# EAGLE board MainBoard (EAGLE 6.3)
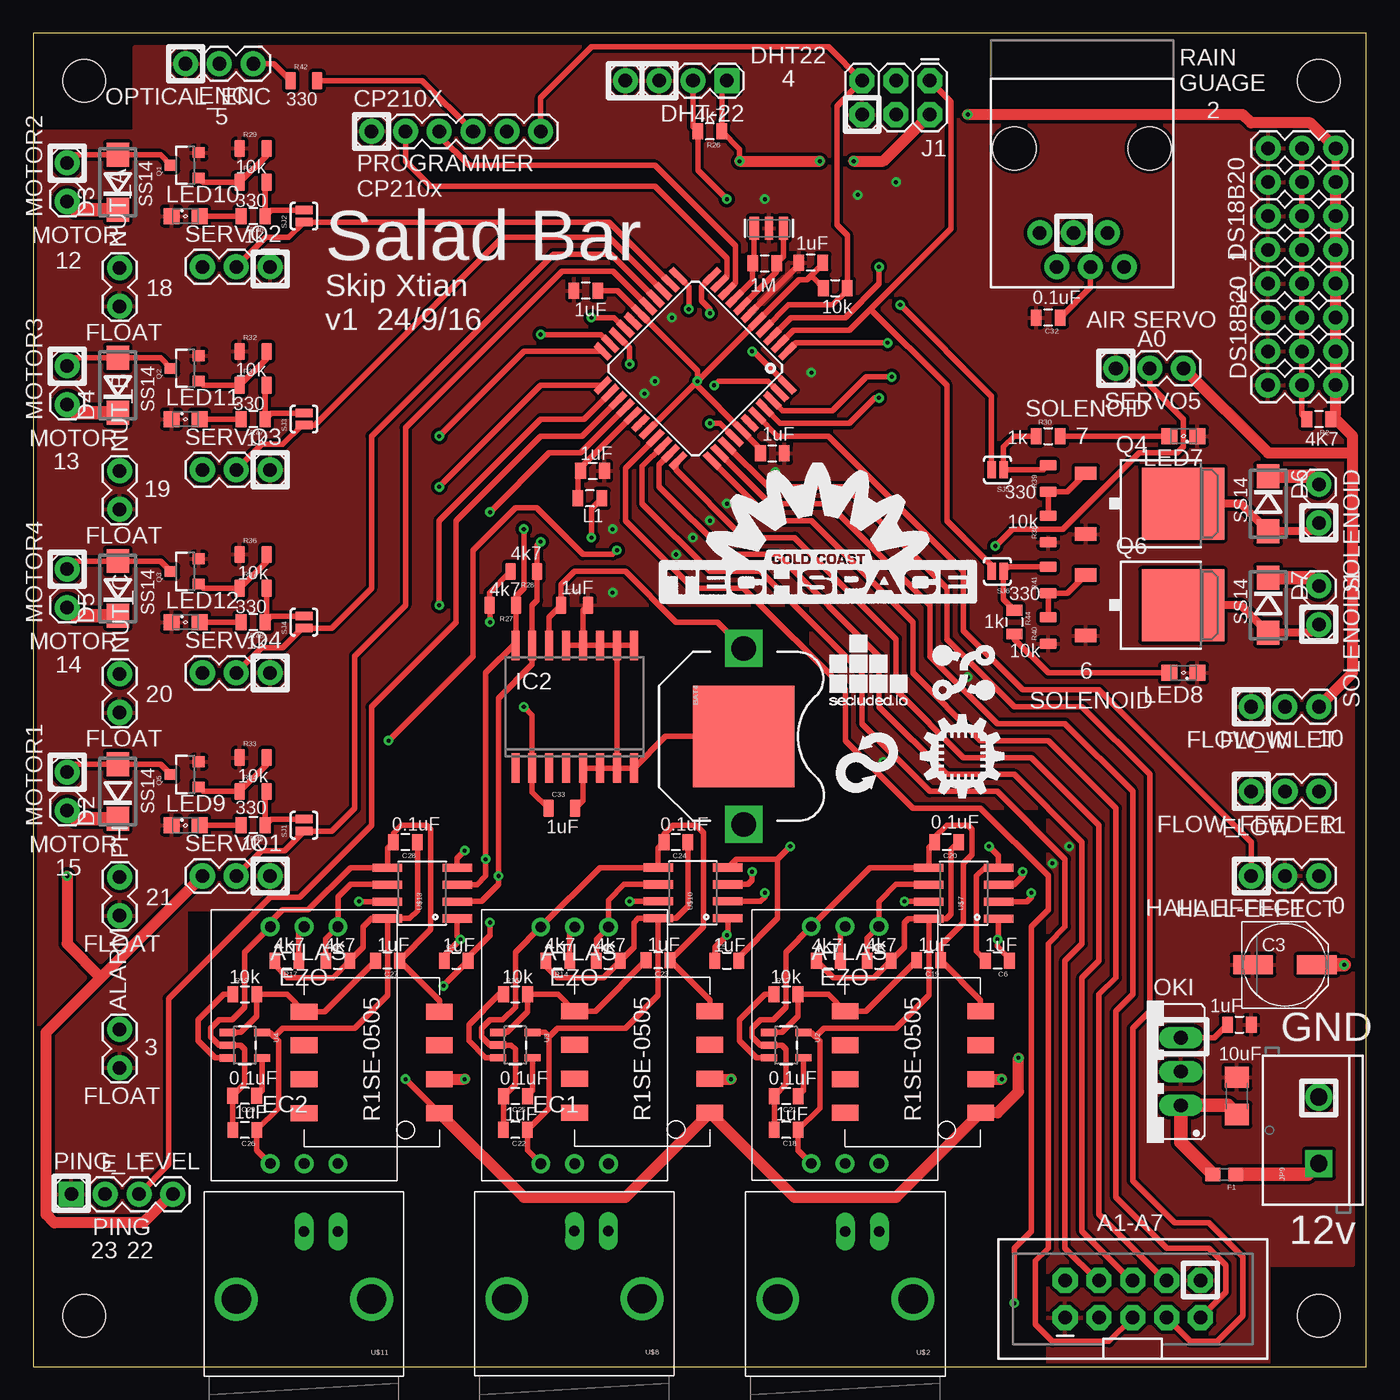
[diagram p0: board, top side]
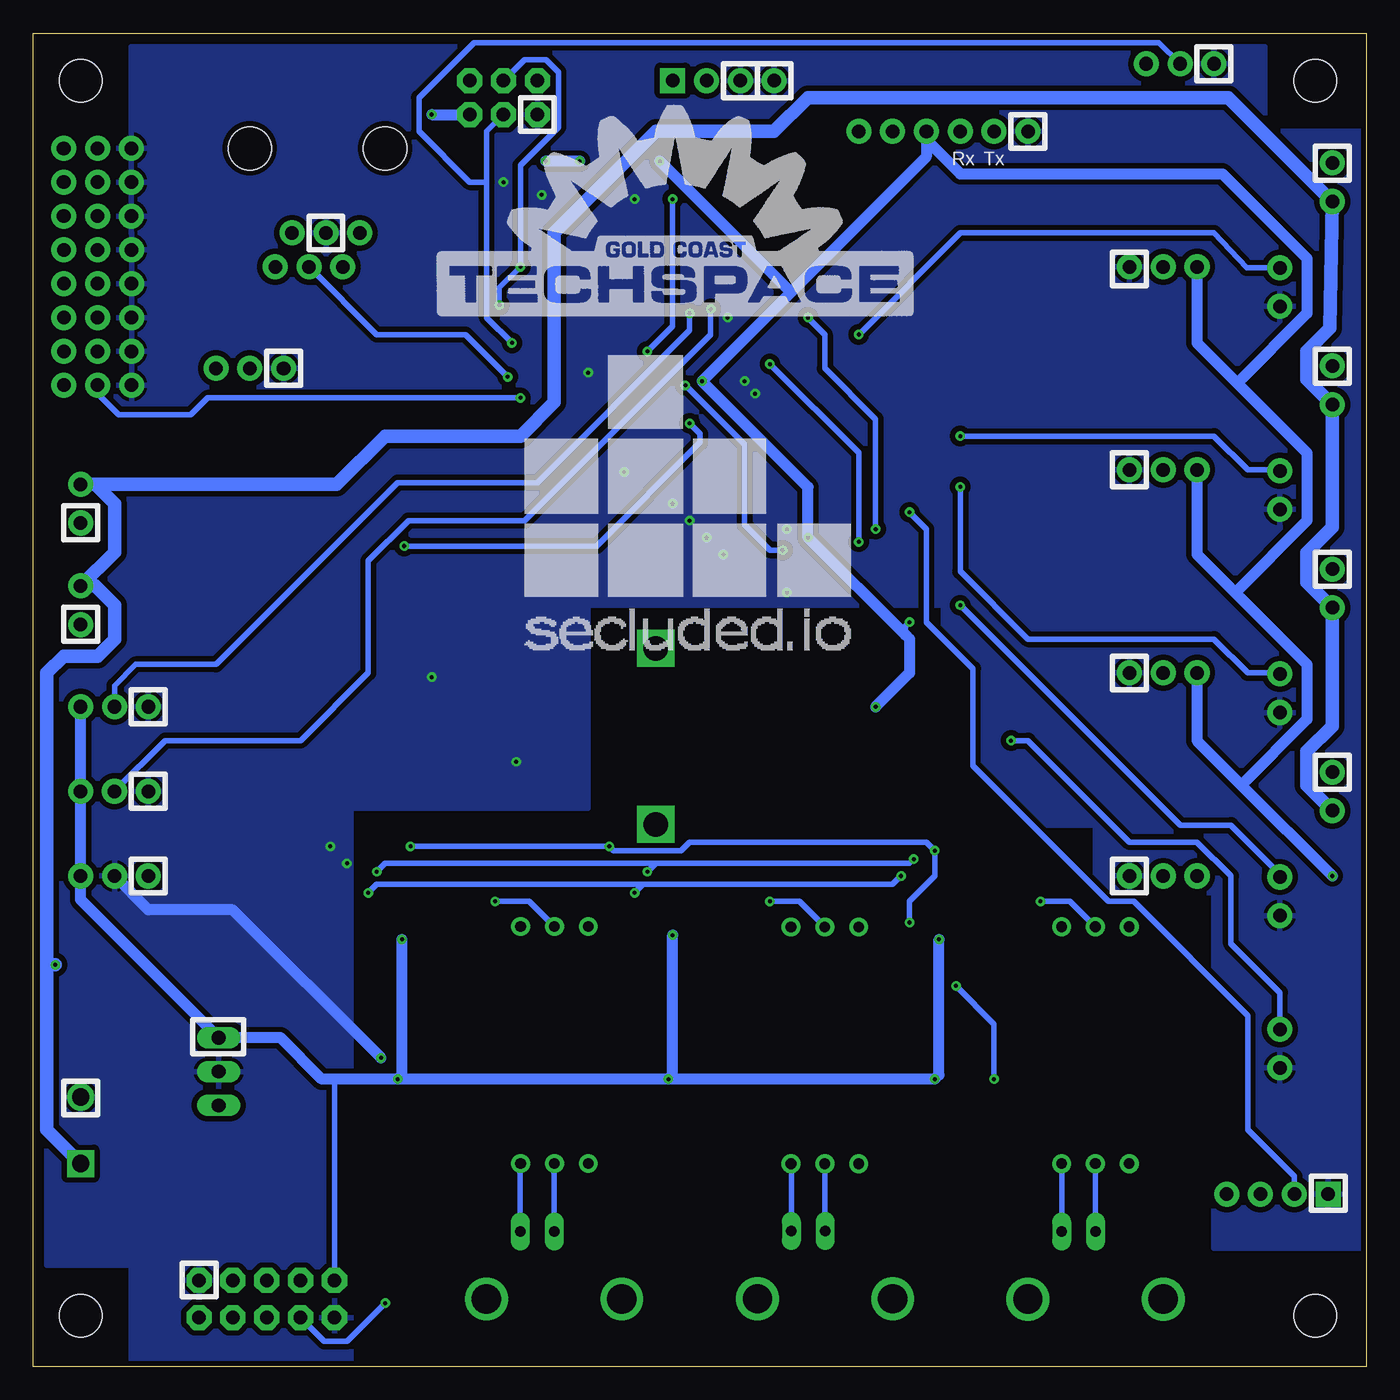
[diagram p1: board, bottom side, seen from below]

Size 100.08 x 100.08 mm. Coordinates in mm from the lower left corner, seen from the top.
Outline: 0,0 100.08,0 100.08,100.08 0,100.08 0,0
Copper layers (1*16): Top 0.035mm / dielectric 1.5mm / Bottom 0.035mm
Design rules "DFRobot_Eagle_Rule_v0.4": minimum track width 6mil, minimum drill 12mil, track to track 6mil, track to pad 6mil, pad to pad 6mil, via to via 6mil, smd to smd 0mil, copper to edge 10mil, drill to drill 10mil, minimum pad ring 12mil, minimum via ring 8mil, stop-mask expansion 2mil, vias tented up to drill 25mil, thermal gap 10mil
Holes 3.2 mm at 3.81,3.81 96.52,3.81 96.52,96.52 3.81,96.52

## Footprints (pad centres in the part's own frame; a part is rotated, then mirrored left to right if it is on the bottom)
1X02_LOCK = drill 1.016 pad 1.88: 1 -0.178,0; 2 2.718,0
BATTCON_12MM_PTH = smd 7.62 x 7.62: GND 0,0 | drill 1.854 square: VCC@1 -6.604,0; VCC@2 6.604,0
1206 = smd 1.6 x 1.8: 1 -1.4,0; 2 1.4,0
PANASONIC_D = smd 3 x 1.4: + 2.4,0; - -2.4,0
0805 = smd 0.8 x 1.2: 1 -0.9,0; 2 0.9,0
0805' = smd 0.8 x 1.3: 1 -1,0; 2 1,0
1X06 = drill 1.016 pad 1.88: 1 0,0; 2 2.54,0; 3 5.08,0; 4 7.62,0; 5 10.16,0; 6 12.7,0
DO214BA = smd 1.8 x 1.7: A 2.05,0; C -2.05,0
1X04 = drill 1.016 pad 1.88 square: 1 0,0 | drill 1.016 pad 1.88: 2 2.54,0; 3 5.08,0; 4 7.62,0
1X03 = drill 1.016 pad 1.88: 1 0,0; 2 2.54,0; 3 5.08,0
ATLAS-EZO = drill 0.8: GND -2.54,8.89; PRA 2.54,-8.89; PRB 0,-8.89; RX 2.54,8.89; TX 0,8.89; VCC -2.54,-8.89
0603 = smd 1.1 x 1: 1 -0.85,0; 2 0.85,0
TQFP44 = smd 1.5 x 0.5: 1 -5.8,4; 2 -5.8,3.2; 3 -5.8,2.4; 4 -5.8,1.6; 5 -5.8,0.8; 6 -5.8,0; 7 -5.8,-0.8; 8 -5.8,-1.6; 9 -5.8,-2.4; 10 -5.8,-3.2; 11 -5.8,-4; 23 5.8,-4; 24 5.8,-3.2; 25 5.8,-2.4; 26 5.8,-1.6; 27 5.8,-0.8; 28 5.8,0; 29 5.8,0.8; 30 5.8,1.6; 31 5.8,2.4; 32 5.8,3.2; 33 5.8,4 | smd 0.5 x 1.5: 12 -4,-5.8; 13 -3.2,-5.8; 14 -2.4,-5.8; 15 -1.6,-5.8; 16 -0.8,-5.8; 17 0,-5.8; 18 0.8,-5.8; 19 1.6,-5.8; 20 2.4,-5.8; 21 3.2,-5.8; 22 4,-5.8; 34 4,5.8; 35 3.2,5.8; 36 2.4,5.8; 37 1.6,5.8; 38 0.8,5.8; 39 0,5.8; 40 -0.8,5.8; 41 -1.6,5.8; 42 -2.4,5.8; 43 -3.2,5.8; 44 -4,5.8
SO16W = smd 0.6 x 2.2: 1 -4.445,-4.6; 2 -3.175,-4.6; 3 -1.905,-4.6; 4 -0.635,-4.6; 5 0.635,-4.6; 6 1.905,-4.6; 7 3.175,-4.6; 8 4.445,-4.6; 9 4.445,4.6; 10 3.175,4.6; 11 1.905,4.6; 12 0.635,4.6; 13 -0.635,4.6; 14 -1.905,4.6; 15 -3.175,4.6; 16 -4.445,4.6
2X3 = drill 1.016 pad 1.88 octagon: 1 0,0; 2 0,2.54; 3 2.54,0; 4 2.54,2.54; 5 5.08,0; 6 5.08,2.54
SCREWTERMINAL-5MM-2 = drill 1.3 pad 2.032 square: 1 0,0 | drill 1.3 pad 2.032: 2 5,0
SML0805 = smd 1.2 x 1.2: A 1.05,0; C -1.05,0
78XXS = drill 1.016 long: GND 0,-2.54; IN -2.54,-2.54; OUT 2.54,-2.54
SOT23-3 = smd 0.8 x 0.9: 1 -0.95,-1; 2 0.95,-1; 3 0,1.1
DPACK = smd 1 x 1.6: 1 -2.28,-4.8; 3 2.28,-4.8 | smd 5.4 x 6.2: 2 0,2.5
RJ11-6 = drill 1.016 pad 1.88: 1 1.905,8.89; 2 3.175,6.35; 3 4.445,8.89; 4 5.715,6.35; 5 6.985,8.89; 6 8.255,6.35 | hole 3.251: 0,0; 10.16,0
SJ_2S-NO = smd 0.635 x 1.27: 1 -0.45,0; 2 0.45,0
2X5-SHROUDED_LOCK = drill 1.016 pad 1.88 octagon: 1 -1.397,5.08; 2 1.397,5.08; 3 -1.397,2.54; 4 1.397,2.54; 5 -1.397,0; 6 1.397,0; 7 -1.397,-2.54; 8 1.397,-2.54; 9 -1.397,-5.08; 10 1.397,-5.08
SOT23-5 = smd 0.55 x 1.2: 1 -0.95,-1.3; 2 0,-1.3; 3 0.95,-1.3; 4 0.95,1.3; 5 -0.95,1.3
BNC = drill 2.2: 3 -5.08,5.08; 4 5.08,5.08 | drill 0.8 long: GND -2.54,0; S 0,0
R1SE-0505 = smd 1.2 x 2: GND -3.81,-5.08; ISO_GND 3.81,-5.08; ISO_VCC 3.81,5.08; P$1 1.27,-5.08; P$5 1.27,5.08; P$7 -1.27,5.08; P$8 -3.81,5.08; VCC -1.27,-5.08
SO08 = smd 0.61 x 2.21: 1 -1.905,-2.616; 2 -0.635,-2.616; 3 0.635,-2.616; 4 1.905,-2.616; 5 1.905,2.616; 6 0.635,2.616; 7 -0.635,2.616; 8 -1.905,2.616
FREQCTRL_RESONATOR-SMD = smd 0.7 x 1.7: 1 -1.1,0; 3 1.1,0 | smd 0.6 x 1.7: 2 0,0

## Placement (x,y rotation side)
ALARM  [1X02_LOCK]  6.48,25.15 270 top
BAT4  [BATTCON_12MM_PTH]  53.34,47.31 270 top
C1  10uF  [1206]  90.37,20.32 90 top
C3  [PANASONIC_D]  93.98,30.16 0 top
C4  1uF  [0805]  31.75,30.48 0 top
C5  1uF  [0805]  52.07,30.48 0 top
C6  1uF  [0805]  72.39,30.48 180 top
C7  1uF  [0805]  58.37,82.87 180 top
C10  1uF  [0805]  41.99,67.23 0 top
C12  1uF  [0805]  90.55,25.68 0 top
C13  1uF  [0805]  41.49,80.77 180 top
C14  1uF  [0805]  55.49,68.55 0 top
C18  1uF  [0805]  56.53,17.78 180 top
C19  1uF  [0805]  67.23,30.49 180 top
C20  0.1uF  [0805]  68.56,39.37 180 top
C21  0.1uF  [0805]  56.54,20.32 180 top
C22  1uF  [0805]  36.19,17.77 180 top
C23  1uF  [0805]  46.91,30.49 180 top
C24  0.1uF  [0805]  48.25,39.37 180 top
C25  0.1uF  [0805]  36.2,20.31 180 top
C26  1uF  [0805]  15.88,17.77 180 top
C27  1uF  [0805]  26.6,30.48 180 top
C28  0.1uF  [0805]  27.94,39.37 180 top
C29  0.1uF  [0805]  15.87,20.32 180 top
C32  0.1uF  [0805]  76.2,78.74 180 top
C33  1uF  [0805']  39.69,41.91 0 top
C34  1uF  [0805']  40.64,57.15 0 top
CP210X  [1X06]  25.4,92.71 0 top
D2  SS14  [DO214BA]  6.35,43.18 90 top
D3  SS14  [DO214BA]  6.35,88.9 90 top
D4  SS14  [DO214BA]  6.35,73.66 90 top
D5  SS14  [DO214BA]  6.35,58.42 90 top
D6  SS14  [DO214BA]  92.71,64.77 270 top
D7  SS14  [DO214BA]  92.71,57.15 270 top
DHT-22  [1X04]  52.07,96.52 180 top
DS18B20_1  [1X03]  97.78,73.66 180 top
DS18B20_2  [1X03]  97.78,76.2 180 top
DS18B20_3  [1X03]  97.78,78.74 180 top
DS18B20_4  [1X03]  97.78,81.28 180 top
DS18B20_5  [1X03]  97.78,83.82 180 top
DS18B20_6  [1X03]  97.79,86.36 180 top
DS18B20_7  [1X03]  97.79,88.9 180 top
DS18B20_8  [1X03]  97.79,91.44 180 top
EC  ATLAS-EZO  [ATLAS-EZO]  60.95,24.14 0 top
EC1  ATLAS-EZO  [ATLAS-EZO]  40.64,24.12 0 top
EC2  [ATLAS-EZO]  20.33,24.13 0 top
F1  PTC0603  [0603]  89.41,14.43 180 top
FLOW_FEEDER  [1X03]  96.52,43.18 180 top
FLOW_INLET  [1X03]  96.52,49.53 180 top
HALL-EFFECT  [1X03]  96.52,36.83 180 top
IC1  ATMEGA644A  [TQFP44]  49.69,74.93 225 top
IC2  DS3231/SO  [SO16W]  40.64,49.53 0 top
J1  AVR_SPI_PRG_6PTH  [2X3]  67.31,96.52 180 top
JP9  [SCREWTERMINAL-5MM-2]  96.52,15.24 90 top
L1  [0805]  41.78,65.17 180 top
LED7  [SML0805]  86.36,69.85 180 top
LED8  [SML0805]  86.36,52.07 180 top
LED9  [SML0805]  11.43,40.64 0 top
LED10  [SML0805]  11.43,86.36 0 top
LED11  [SML0805]  11.43,71.12 0 top
LED12  [SML0805]  11.43,55.88 0 top
MOTOR1  [1X02_LOCK]  2.54,41.91 90 top
MOTOR2  [1X02_LOCK]  2.54,87.63 90 top
MOTOR3  [1X02_LOCK]  2.54,72.39 90 top
MOTOR4  [1X02_LOCK]  2.54,57.15 90 top
NUT_A  [1X02_LOCK]  6.48,82.3 270 top
NUT_B  [1X02_LOCK]  6.48,67.06 270 top
NUT_C  [1X02_LOCK]  6.48,51.82 270 top
OKI  [78XXS]  83.62,22.15 90 top
OPTICAL_ENC  [1X03]  16.51,97.79 180 top
PH  [1X02_LOCK]  6.48,36.58 270 top
PING_LEVEL  [1X04]  2.86,12.95 0 top
Q1  NTD5867NLT4G  [SOT23-3]  11.43,90.17 90 top
Q2  NTD5867NLT4G  [SOT23-3]  11.43,74.93 90 top
Q3  NTD5867NLT4G  [SOT23-3]  11.43,59.69 90 top
Q4  NTD5867NLT4G  [DPACK]  83.82,64.77 270 top
Q5  NTD5867NLT4G  [SOT23-3]  11.43,44.45 90 top
Q6  NTD5867NLT4G  [DPACK]  83.82,57.15 270 top
R1  10k  [0805]  60.22,80.96 0 top
R2  4K7  [0805]  96.52,71.12 180 top
R4  1M  [0805]  54.91,82.81 0 top
R10  4k7  [0805]  59.7,30.48 180 top
R11  4k7  [0805]  63.51,30.48 0 top
R12  10k  [0805]  56.52,27.94 0 top
R14  4k7  [0805]  39.37,30.47 180 top
R15  4k7  [0805]  43.17,30.48 0 top
R16  10k  [0805]  36.21,27.94 0 top
R17  4k7  [0805]  19.04,30.48 180 top
R18  4k7  [0805]  22.87,30.48 0 top
R19  10k  [0805]  15.88,27.94 0 top
R26  4k7  [0805]  50.8,92.71 180 top
R27  4k7  [0805']  35.24,57.15 180 top
R28  4k7  [0805']  36.83,59.69 180 top
R29  10k  [0805']  16.51,91.44 0 top
R30  1k  [0805]  76.2,69.85 0 top
R31  330  [0805']  16.51,88.9 0 top
R32  10k  [0805']  16.51,76.2 0 top
R33  10k  [0805']  16.51,45.72 0 top
R34  330  [0805']  16.51,43.18 0 top
R35  330  [0805']  16.51,73.66 0 top
R36  10k  [0805']  16.51,60.96 0 top
R37  330  [0805']  16.51,58.42 0 top
R38  10k  [0805']  76.2,62.87 90 top
R39  330  [0805']  76.2,66.67 90 top
R40  10k  [0805']  76.2,55.24 90 top
R41  330  [0805']  76.2,59.05 90 top
R42  330  [0805']  20.32,96.52 0 top
R44  1k  [0805]  73.66,55.88 270 top
R45  1k  [0805]  16.51,40.64 180 top
R46  1k  [0805]  16.51,86.36 180 top
R47  1k  [0805]  16.51,71.12 180 top
R48  1k  [0805]  16.51,55.88 180 top
RAIN  RJ11-6PTH  [RJ11-6]  83.82,91.44 180 top
SERVO1  [1X03]  12.7,36.83 0 top
SERVO2  [1X03]  12.7,82.55 0 top
SERVO3  [1X03]  12.7,67.31 0 top
SERVO4  [1X03]  12.7,52.07 0 top
SERVO5  [1X03]  86.36,74.93 180 top
SJ1  SJ  [SJ_2S-NO]  20.32,40.64 90 top
SJ2  SJ  [SJ_2S-NO]  20.32,86.36 90 top
SJ3  SJ  [SJ_2S-NO]  20.32,71.12 90 top
SJ4  SJ  [SJ_2S-NO]  20.32,55.88 90 top
SJ5  SJ  [SJ_2S-NO]  72.39,67.31 180 top
SJ6  SJ  [SJ_2S-NO]  72.39,59.69 180 top
SOLENOID  [1X02_LOCK]  96.52,66.04 270 top
SOLENOID1  [1X02_LOCK]  96.52,58.42 270 top
SWITCH_BRD2  M05X2SHD_LOCK  [2X5-SHROUDED_LOCK]  82.55,5.08 90 top
U2  TPS73150DBVT  [SOT23-5]  56.52,24.13 270 top
U3  TPS73150DBVT  [SOT23-5]  36.19,24.13 270 top
U4  TPS73150DBVT  [SOT23-5]  15.88,24.13 270 top
U$1  [REFACTORLOOP]  62.38,45.62 90 top
U$2  BNCPTH  [BNC]  60.97,10.16 180 top
U$6  R1SE-0505  [R1SE-0505]  66.04,22.86 90 top
U$7  SI860X  [SO08]  69.86,35.54 90 top
U$8  BNCPTH  [BNC]  40.63,10.17 180 top
U$9  R1SE-0505  [R1SE-0505]  45.72,22.88 90 top
U$10  SI860X  [SO08]  49.53,35.56 90 top
U$11  BNCPTH  [BNC]  20.32,10.15 180 top
U$12  R1SE-0505  [R1SE-0505]  25.41,22.85 90 top
U$13  SI860X  [SO08]  29.21,35.54 90 top
U$15  [SECLUDED_5MM]  59.69,49.53 0 top
U$17  [ESPDUINO_LOGO_5MM]  69.85,52.07 0 top
U$18  [GCTS_X0.5_TSILK]  46.99,57.15 0 top
U$20  [ID_LOGO_X0.25]  66.52,42.55 0 top
U$22  [GCTS_X0.75]  69.85,78.74 0 bottom
U$23  [SECLUDED_25MM]  63.5,53.34 0 bottom
Y1  FREQCTRL_RESONATORSMD  [FREQCTRL_RESONATOR-SMD]  55.22,85.45 180 top

## Library data of the parts
ALARM DHT-22 DS18B20_1-DS18B20_8 FLOW_FEEDER FLOW_INLET HALL-EFFECT J1 JP9 MOTOR1-MOTOR4 NUT_A NUT_B NUT_C OPTICAL_ENC PH PING_LEVEL RAIN SERVO1-SERVO5 SOLENOID SOLENOID1 SWITCH_BRD2 U$2 U$8 U$11 = SparkFun-Connectors
BAT4 = SparkFun-Electromechanical
C1 C3-C7 C10 C12-C14 C18-C29 C32 = SparkFun-Capacitors
C33 C34 R27-R29 R31-R42 = LowPowerLab
CP210X = SparkFun-Connectors; PROD_ID: CONN-08437
D2-D7 = diode
EC EC1 EC2 U$6 U$7 U$9 U$10 U$12 U$13 U$15 U$17 U$23 = 1_Skips
F1 U2-U4 = SparkFun-PowerIC
IC1 = atmel; MPN: ATMEGA644PV-10AU; OC_FARNELL: 1455123; OC_NEWARK: 58M3748
IC2 = adafruit
L1 SJ1-SJ6 = SparkFun-Passives
LED7-LED12 = led
OKI = v-reg
Q1-Q6 = freetronics-master-v1.1
R1 R2 R4 R10-R12 R14-R19 R26 R30 R44-R48 = SparkFun-Resistors
U$1 = Skips
U$18 U$20 U$22 = 11_Skips_Refactor
Y1 = 01_Skip_Tested

## Nets
5V: C4.1 C5.1 C6.1 C7.1 C12.1 C13.1 C14.1 C33.1 CP210X.4 DHT-22.1 DS18B20_1.1 DS18B20_2.1 DS18B20_3.1 DS18B20_4.1 DS18B20_5.1 DS18B20_6.1 DS18B20_7.1 DS18B20_8.1 FLOW_FEEDER.1 FLOW_INLET.1 HALL-EFFECT.1 IC1.5 IC1.17 IC1.29 IC1.38 IC2.2 J1.2 L1.1 OKI.OUT PING_LEVEL.4 R1.1 R2.1 R26.1 R27.2 R28.2 R42.2 SERVO1.1 SERVO2.1 SERVO3.1 SERVO4.1 SERVO5.1 SWITCH_BRD2.2 U$6.VCC U$7.1 U$9.VCC U$10.1 U$12.VCC U$13.1
12.0V: C3.+ D2.C D3.C D4.C D5.C D6.C D7.C F1.1 JP9.1 MOTOR1.1 MOTOR2.1 MOTOR3.1 MOTOR4.1 SOLENOID1.1 SOLENOID.1
AIR: IC1.37 SERVO5.2
AIR_PUMP: IC1.31 SWITCH_BRD2.5
COOLING: IC1.34 SWITCH_BRD2.8
CURRENT_SENSE: IC1.32 SWITCH_BRD2.4
D1: D3.A MOTOR2.2 Q1.3
D2: D4.A MOTOR3.2 Q2.3
D3: D5.A MOTOR4.2 Q3.3
D4: D2.A MOTOR1.2 Q5.3
D5: D6.A Q4.2 SOLENOID.2
D6: D7.A Q6.2 SOLENOID1.2
DHT22: DHT-22.2 IC1.44 R26.2
DUMP_HALL-EFFECT: HALL-EFFECT.3 IC1.40
DUMP_PUMP: IC1.35 SWITCH_BRD2.9
FEED_PUMP: IC1.30 SWITCH_BRD2.3
FEEDER_FLOW: FLOW_FEEDER.2 IC1.12
FLOAT_LEVEL-ALARM: ALARM.1 IC1.43
FLOAT_NUT_A: IC1.21 NUT_A.1
FLOAT_NUT_B: IC1.22 NUT_B.1
FLOAT_NUT_C: IC1.23 NUT_C.1
FLOAT_PH_DOWN: IC1.24 PH.1
GND: ALARM.2 BAT4.GND C1.2 C3.- C4.2 C5.2 C6.2 C7.2 C10.2 C12.2 C13.2 C14.2 C32.2 C33.2 C34.2 CP210X.1 DHT-22.3 DHT-22.4 DS18B20_1.3 DS18B20_2.3 DS18B20_3.3 DS18B20_4.3 DS18B20_5.3 DS18B20_6.3 DS18B20_7.3 DS18B20_8.3 FLOW_FEEDER.3 FLOW_INLET.3 HALL-EFFECT.2 IC1.6 IC1.18 IC1.28 IC1.39 IC2.5 IC2.6 IC2.7 IC2.8 IC2.9 IC2.10 IC2.11 IC2.12 IC2.13 J1.6 JP9.2 LED7.C LED8.C LED9.C LED10.C LED11.C LED12.C NUT_A.2 NUT_B.2 NUT_C.2 OKI.GND OPTICAL_ENC.3 PH.2 PING_LEVEL.1 Q1.2 Q2.2 Q3.2 Q4.3 Q5.2 Q6.3 R29.1 R32.1 R33.1 R36.1 R38.1 R40.1 RAIN.4 SERVO1.3 SERVO2.3 SERVO3.3 SERVO4.3 SERVO5.3 SWITCH_BRD2.1 SWITCH_BRD2.10 U$6.GND U$7.4 U$9.GND U$10.4 U$12.GND U$13.4 Y1.2
HEATING: IC1.36 SWITCH_BRD2.7
INLET_FLOW: FLOW_INLET.2 IC1.11
LEVEL_PING-ECHO: IC1.26 PING_LEVEL.2
LEVEL_PING-TRIG: IC1.25 PING_LEVEL.3
LIGHTS: IC1.33 SWITCH_BRD2.6
N$2: IC1.7 R4.2 Y1.1
N$3: IC1.8 R4.1 Y1.3
N$8: EC.PRA U$2.GND
N$9: EC.PRB U$2.S
N$10: C18.2 C19.1 C20.2 C21.2 EC.GND U2.2 U$6.ISO_GND U$7.5
N$11: C18.1 C20.1 EC.VCC R10.2 R11.2 U2.5 U$7.8
N$12: EC.RX R11.1 U$7.6
N$13: C10.1 IC1.27 L1.2
N$14: EC.TX R10.1 U$7.7
N$15: R12.1 U2.3
N$16: C19.2 R12.2 U2.1 U$6.ISO_VCC
N$17: C1.1 F1.2 OKI.IN
N$18: EC1.PRB U$8.S
N$19: C21.1 U2.4
N$20: C22.2 C23.1 C24.2 C25.2 EC1.GND U3.2 U$9.ISO_GND U$10.5
N$21: C22.1 C24.1 EC1.VCC R14.2 R15.2 U3.5 U$10.8
N$22: EC1.PRA U$8.GND
N$23: EC1.RX R15.1 U$10.6
N$24: EC1.TX R14.1 U$10.7
N$25: C23.2 R16.2 U3.1 U$9.ISO_VCC
N$26: C25.1 U3.4
N$27: R16.1 U3.3
N$28: EC2.PRB U$11.S
N$29: C26.2 C27.1 C28.2 C29.2 EC2.GND U4.2 U$12.ISO_GND U$13.5
N$30: C26.1 C28.1 EC2.VCC R17.2 R18.2 U4.5 U$13.8
N$31: EC2.PRA U$11.GND
N$32: EC2.RX R18.1 U$13.6
N$33: EC2.TX R17.1 U$13.7
N$34: C27.2 R19.2 U4.1 U$12.ISO_VCC
N$35: C29.1 U4.4
N$36: R19.1 U4.3
N$54: BAT4.VCC@1 C34.1 IC2.14
N$55: Q5.1 R33.2 R34.1
N$56: LED7.A R30.2
N$57: Q1.1 R29.2 R31.1
N$58: R34.2 R45.1 SJ1.2
N$61: R31.2 R46.1 SJ2.2
N$62: Q2.1 R32.2 R35.1
N$63: R35.2 R47.1 SJ3.2
N$64: Q3.1 R36.2 R37.1
N$65: R37.2 R48.1 SJ4.2
N$66: Q4.1 R38.2 R39.1
N$67: Q6.1 R40.2 R41.1
N$68: LED8.A R44.2
N$69: LED9.A R45.2
N$70: R30.1 R39.2 SJ5.1
N$71: R41.2 R44.1 SJ6.1
N$72: LED11.A R47.2
N$73: OPTICAL_ENC.1 R42.1
N$77: LED10.A R46.2
N$78: LED12.A R48.2
NUT_A: IC1.13 SERVO2.2 SJ2.1
NUT_B: IC1.14 SERVO3.2 SJ3.1
NUT_C: IC1.15 SERVO4.2 SJ4.1
OPTICAL_ENC: IC1.1 J1.4 OPTICAL_ENC.2
PH_DOWN: IC1.16 SERVO1.2 SJ1.1
PROBE_SCL: IC1.19 IC2.16 R27.1 U$7.3 U$10.3 U$13.3
PROBE_SDA: IC1.20 IC2.15 R28.1 U$7.2 U$10.2 U$13.2
RAIN_GUAGE: C32.1 IC1.42 RAIN.3
RST: CP210X.6 IC1.4 J1.5 R1.2
RX: CP210X.3 IC1.9
SOLENOID: IC1.3 J1.3 SJ5.2
SOLENOID1: IC1.2 J1.1 SJ6.2
TEMP: DS18B20_1.2 DS18B20_2.2 DS18B20_3.2 DS18B20_4.2 DS18B20_5.2 DS18B20_6.2 DS18B20_7.2 DS18B20_8.2 IC1.41 R2.2
TX: CP210X.2 IC1.10

## Tracks (layer width: path | path; a pad name or v marks a point on that pad's centre or on a via)
5V  (via drill 0.3)
  Top 0.406: 58.26,81.76 58.1,81.6 57.49,81.6 IC1.5 v49.86,73.97 | 58.26,81.76 59.27,82.77 C7.1 | IC1.29 46.15,70.28 46.17,70.28 v49.86,73.97 | R1.1 58.52,81.76 58.26,81.76 | C13.1 43.85,80.77 IC1.17 49.86,74.76 v49.86,73.97 | U$13.1 31.82,32.31 v32.07,32.07 30.85,30.85 C4.1 | U$10.1 52.14,32.46 v52.07,32.38 51.17,31.48 C5.1 | U$7.1 72.47,32.15 v72.39,32.07 72.39,31.54 73.08,30.85 C6.1 | R42.2 29.21,96.52 CP210X.4 | v49.86,73.97 49.86,73.63 IC1.38 53.22,70.23 54.59,68.87 C14.1 | L1.1 41.91,64.39 v41.91,62.23 | v36.83,49.53 37.47,48.9 IC2.2 37.47,43.13 C33.1 | v34.29,55.88 34.29,57.1 R27.2 34.24,58.1 R28.2 | DHT-22.1 51.7,96.15 R26.1 53.02,91.39 v53.02,90.49 | C12.1 88.67,24.69 OKI.OUT
  Top 0.61: DS18B20_7.1 DS18B20_8.1
  Top 0.813: U$12.VCC 30.5,21.59 v32.38,21.59 | U$9.VCC 51.42,21.59 v52.39,21.59 | U$6.VCC 71.75,21.59 v72.71,21.59 | PING_LEVEL.4 10.16,12.7 8.26,10.79 1.59,10.79 0.95,11.43 0.95,25.08 5.08,29.21 | 5.08,29.21 SERVO1.1 | v2.54,36.83 2.54,31.75 5.08,29.21 | FLOW_INLET.1 99.06,52.07 99.06,68.58 | 99.06,68.58 99.06,69.85 97.79,71.12 R2.1 97.78,71.49 DS18B20_1.1 DS18B20_2.1 DS18B20_3.1 DS18B20_4.1 DS18B20_5.1 DS18B20_6.1 DS18B20_7.1 | DS18B20_8.1 95.89,93.34 91.44,93.34 90.81,93.98 v70.17,93.98 | v53.02,90.49 v59.05,90.49 | v61.59,90.49 63.82,90.49 J1.2 | SERVO5.1 92.71,68.58 99.06,68.58
  Bottom 0.406: SWITCH_BRD2.2 77.47,21.59 | v34.29,55.88 34.61,55.56 34.61,54.93
  Bottom 0.813: v52.39,21.59 v32.38,21.59 32.07,21.91 v32.07,32.07 | v52.39,21.59 v72.71,21.59 | v72.71,21.59 73.03,21.59 | v72.71,21.59 77.47,21.59 78.42,21.59 81.52,24.69 OKI.OUT 96.52,35.05 HALL-EFFECT.1 FLOW_FEEDER.1 FLOW_INLET.1 | v52.39,21.59 52.07,21.91 v52.07,32.38 | v72.71,21.59 72.39,21.91 v72.39,32.07 | SERVO4.1 12.7,46.99 9.37,43.66 | 9.37,43.66 v2.54,36.83 | SERVO3.1 12.7,60.96 9.84,58.1 | 9.84,58.1 4.45,52.7 4.45,48.58 9.37,43.66 | SERVO2.1 12.7,76.83 9.68,73.82 | 9.68,73.82 4.45,68.58 4.45,63.5 9.84,58.1 | CP210X.4 33.02,92.08 | 33.02,92.08 30.48,89.53 10.79,89.53 4.45,83.19 4.45,79.06 9.68,73.82 | 33.02,92.08 33.02,90.81 43.18,80.64 | 43.18,80.64 v49.86,73.97 41.91,66.02 v41.91,62.23 34.61,54.93 34.29,54.61 34.29,52.07 v36.83,49.53 | v70.17,93.98 J1.2 | v53.02,90.49 43.18,80.64 | 43.18,80.64 | v59.05,90.49 v61.59,90.49
12.0V  (via drill 0.3)
  Top 1.016: D2.C 3.14,41.13 MOTOR1.1 | D5.C 3.14,56.37 MOTOR4.1 | D4.C 3.14,71.61 MOTOR3.1 | D3.C 3.14,86.85 MOTOR2.1 | D6.C 95.92,66.82 SOLENOID.1 | D7.C 95.92,59.2 SOLENOID1.1 | JP9.1 95.71,14.43 F1.1 | C3.+ v98.42,30.16
  Bottom 1.016: MOTOR1.1 4.45,43.64 4.45,46.18 2.54,48.08 MOTOR4.1 4.45,58.88 4.45,61.1 2.54,63.01 MOTOR3.1 4.45,74.12 4.45,76.2 2.72,77.93 MOTOR2.1 10.34,95.25 41.91,95.25 44.45,92.71 53.34,92.71 60.96,85.09 60.96,72.39 63.5,69.85 73.66,69.85 77.29,66.22 SOLENOID.1 95.43,66.22 93.98,64.77 93.98,61.14 SOLENOID1.1 95.43,58.6 93.98,57.15 93.98,54.61 95.25,53.34 97.79,53.34 99.06,52.07 99.06,30.16 | 99.06,30.16 99.06,17.78 JP9.1 | v98.42,30.16 99.06,30.16
AIR  (via drill 0.3)
  Top 0.406: IC1.37 51.55,70.8 v50.8,70.8 | v72.23,61.59 73.5,62.87 77.31,62.87 83.03,68.58 85.88,68.58 86.36,69.06 86.36,71.12 83.82,73.66 SERVO5.2
  Bottom 0.406: v50.8,70.8 50.01,70.01 50.01,69.37 57.78,61.59 v72.23,61.59
AIR_PUMP
  Top 0.406: SWITCH_BRD2.5 80.77,1.91 76.52,1.91 75.25,3.17 75.25,7.94 76.2,8.89 76.2,31.75 77.47,33.02 77.47,38.1 72.39,43.18 67.31,43.18 62.23,48.26 62.23,52.07 54.61,59.69 50.8,59.69 45.72,64.77 45.72,67.57 IC1.31
COOLING
  Top 0.406: SWITCH_BRD2.8 84.96,6.48 80.01,11.43 80.01,27.94 81.28,29.21 81.28,41.91 76.2,46.99 71.12,46.99 66.04,52.07 66.04,55.88 58.42,63.5 55.46,63.5 IC1.34
CURRENT_SENSE
  Top 0.406: SWITCH_BRD2.4 79.88,6.48 77.47,8.89 77.47,30.48 78.74,31.75 78.74,39.37 73.66,44.45 68.58,44.45 63.5,49.53 63.5,53.34 55.88,60.96 52.07,60.96 46.99,66.04 46.99,67.71 IC1.32
D1
  Top 0.406: MOTOR2.2 3.14,90.95 D3.A 9.55,90.95 Q1.3
D2
  Top 0.406: MOTOR3.2 3.14,75.71 D4.A 9.55,75.71 Q2.3
D3
  Top 0.406: MOTOR4.2 3.14,60.47 D5.A 9.55,60.47 Q3.3
D4
  Top 0.406: MOTOR1.2 3.14,45.23 D2.A 9.55,45.23 Q5.3
D5
  Top 0.61: SOLENOID.2 95.92,62.72 D6.A 90.66,64.77 Q4.2
D6
  Top 0.61: Q6.2 90.66,57.15 D7.A 95.92,55.1 SOLENOID1.2
DHT22  (via drill 0.3)
  Top 0.406: IC1.44 54.08,76.2 v53.98,76.2 | DHT-22.2 49.53,93.08 R26.2 49.9,89.8 v52.07,87.63
  Bottom 0.406: v53.98,76.2 52.07,78.11 v52.07,87.63
DUMP_HALL-EFFECT
  Top 0.406: IC1.40 54.36,71.37 55.88,69.85 59.69,69.85 69.85,59.69 69.85,55.24 74.3,50.8 80.01,50.8 91.44,39.37 HALL-EFFECT.3
DUMP_PUMP
  Top 0.406: SWITCH_BRD2.9 89.53,5.59 89.53,7.62 88.27,8.89 85.09,8.89 81.28,12.7 81.28,26.67 82.55,27.94 82.55,43.18 77.47,48.26 72.39,48.26 67.31,53.34 67.31,57.15 59.69,64.77 55.32,64.77 IC1.35
FEED_PUMP  (via drill 0.3)
  Top 0.406: v73.66,4.76 73.66,8.89 74.93,10.16 74.93,33.02 76.2,34.29 76.2,36.83 71.12,41.91 66.04,41.91 60.96,46.99 60.96,50.8 53.34,58.42 49.53,58.42 44.45,63.5 44.45,67.43 IC1.30
  Bottom 0.406: SWITCH_BRD2.3 78.23,1.91 76.52,1.91 v73.66,4.76
FEEDER_FLOW  (via drill 0.3)
  Top 0.406: IC1.12 49.21,81.06 v49.21,79.38
  Bottom 0.406: v49.21,79.38 49.21,77.47 63.18,63.5 71.91,63.5 74.93,60.48 74.93,52.07 80.01,46.99 90.17,46.99 FLOW_FEEDER.2
FLOAT_LEVEL-ALARM  (via drill 0.3)
  Top 0.406: IC1.43 55.17,73.98 51.44,73.98 v51.12,73.66 | v43.81,61.28 43.5,60.96 41.27,60.96 37.78,64.45 36.2,64.45 33.02,61.28 33.02,53.34 v26.67,46.99
  Bottom 0.406: ALARM.1 6.48,28.07 10.16,31.75 10.16,36.83 12.7,39.37 17.78,39.37 25.4,46.99 v26.67,46.99 | v51.12,73.66 46.67,69.22 46.67,63.18 44.77,61.28 v43.81,61.28
FLOAT_NUT_A  (via drill 0.3)
  Top 0.406: IC1.21 42.62,77.47 v38.1,77.47
  Bottom 0.406: v38.1,77.47 30.48,85.09 11.43,85.09 8.97,82.47 NUT_A.1
FLOAT_NUT_B  (via drill 0.3)
  Top 0.406: IC1.22 36.83,76.2 v30.48,69.85
  Bottom 0.406: v30.48,69.85 11.43,69.85 8.89,67.31 6.55,67.31 NUT_B.1
FLOAT_NUT_C  (via drill 0.3)
  Top 0.406: IC1.23 38.1,73.66 v30.48,66.04
  Bottom 0.406: v30.48,66.04 30.48,59.69 25.4,54.61 11.43,54.61 8.89,52.07 6.55,52.07 NUT_C.1
FLOAT_PH_DOWN  (via drill 0.3)
  Top 0.406: IC1.24 41.35,71.12 38.1,71.12 30.48,63.5 v30.48,57.15
  Bottom 0.406: v30.48,57.15 13.97,40.64 10.16,40.64 6.48,36.96 PH.1
GND  (via drill 0.3)
  Top 0.406: IC1.6 57.47,82.71 C7.2 | C34.2 41.27,56.78 IC2.12 | IC2.13 IC2.12 | IC2.12 IC2.11 IC2.10 | IC2.10 IC2.9 | IC2.10 IC2.7 | IC2.7 IC2.8 47.46,47.31 BAT4.GND | IC2.7 IC2.6 IC2.5 41.27,42.5 C33.2 | v71.75,39.05 72.47,38.33 U$7.4 72.45,37.47 71.44,37.47 70.8,36.83 70.8,31.17 C6.2 | v56.83,39.05 55.88,38.1 | 55.88,38.1 52.78,38.1 U$10.4 | C5.2 52.97,30.75 55.88,33.66 55.88,38.1 | U$13.4 31.82,38.17 v32.38,38.73 | v34.29,33.34 34.29,32.38 32.65,30.75 C4.2 30.8,28.63 v30.8,28.57 | v27.94,21.59 U$12.GND
  Top 0.813: U$12.GND 36.83,12.7 44.45,12.7 50.8,19.05 U$9.GND 57.17,12.7 64.77,12.7 U$6.GND | U$6.GND 72.39,19.05 73.98,20.64 v73.98,23.18 | U$6.GND
  Bottom 0.406: v71.75,39.05 v56.83,39.05 56.52,38.73 51.44,38.73 50.8,39.37 33.02,39.37 v32.38,38.73 32.38,36.83 34.29,34.92 v34.29,33.34 | v30.8,28.57 27.94,25.72 v27.94,21.59
  Bottom 0.813: v73.98,23.18 85.09,34.29 91.44,34.29 HALL-EFFECT.2
  other vias: 43.5,58.1 48.26,60.96 49.53,62.23 50.8,63.5 52.07,64.77 70.17,51.75 63.82,45.4 76.52,37.78 77.79,39.05 55.72,67.15 45.88,73.03 46.67,73.98 47.94,78.74 58.42,74.61 54.93,87.63 61.91,87.95 64.77,88.9 43.5,62.87
  pour Bottom (isolate 0.406): 11.43,8.89 0,8.89 0,92.71 7.62,92.71 7.62,99.06 92.71,99.06 92.71,92.71 99.06,92.71 99.06,7.62 92.71,7.62 92.71,0 76.2,0 76.2,41.91 58.42,41.91 58.42,57.15 31.75,57.15 31.75,40.64 20.32,40.64 20.32,35.56 11.43,35.56
  pour Top (isolate 0.254): 11.43,8.89 0,8.89 0,92.71 7.62,92.71 7.62,99.06 92.71,99.06 92.71,92.71 99.06,92.71 99.06,7.62 92.71,7.62 92.71,0 76.2,0 76.2,41.91 58.42,41.91 58.42,57.15 33.02,57.15 33.02,40.64 20.32,34.29 11.43,34.29
HEATING
  Top 0.406: SWITCH_BRD2.7 86.87,1.91 88.9,1.91 90.81,3.81 90.81,8.26 88.27,10.79 85.72,10.79 82.55,13.97 82.55,25.4 83.82,26.67 83.82,44.45 78.74,49.53 73.66,49.53 68.58,54.61 68.58,58.42 60.96,66.04 55.19,66.04 IC1.36
INLET_FLOW  (via drill 0.3)
  Top 0.406: IC1.11 50.16,81.06 50.16,80.01 50.8,79.38 v50.8,79.06
  Bottom 0.406: v50.8,79.06 50.8,77.79 62.23,66.36 72.71,66.36 86.36,52.7 92.39,52.7 93.98,51.12 FLOW_INLET.2
LEVEL_PING-ECHO  (via drill 0.3)
  Top 0.406: v34.29,64.14 38.73,68.58 41.08,68.58 IC1.26
  Bottom 0.406: PING_LEVEL.2 5.4,14.29 8.89,17.78 8.89,26.35 17.46,34.92 19.37,34.92 29.53,45.09 29.53,52.39 33.02,55.88 33.02,62.87 v34.29,64.14
LEVEL_PING-TRIG
  Top 0.406: IC1.25 41.22,69.85 38.1,69.85 31.75,63.5 31.75,55.88 25.4,49.53 25.4,40.64 20,35.24 17.78,35.24 10.16,27.62 10.16,15.18 PING_LEVEL.3
LIGHTS
  Top 0.406: SWITCH_BRD2.6 82.42,6.48 78.74,10.16 78.74,29.21 80.01,30.48 80.01,40.64 74.93,45.72 69.85,45.72 64.77,50.8 64.77,54.61 57.15,62.23 53.34,62.23 48.26,67.31 48.26,67.84 IC1.33
N$2
  Top 0.406: IC1.7 55.81,82.18 R4.2 56.32,83.32 Y1.1
N$3
  Top 0.406: IC1.8 54.01,81.51 R4.1 54.12,82.92 Y1.3
N$8
  Bottom 0.406: EC.PRA 63.51,15.23 U$2.GND
N$9
  Bottom 0.406: EC.PRB 60.97,15.23 U$2.S
N$10
  Top 0.406: C18.2 55.64,17.79 C21.2 56.52,21.19 56.52,23.81 56.2,24.13 U2.2 54.61,24.13 53.98,24.77 53.98,25.4 54.61,26.04 55.56,26.04 56.52,26.99 56.52,31.11 58.41,33.01 EC.GND 62.81,37.44 U$7.5 67.24,38.95 C20.2 67.67,39.73 68.58,40.64 70.17,40.64 70.48,40.32 70.48,38.42 69.85,37.78 69.85,33.34 68.13,31.62 C19.1 71.12,27.5 U$6.ISO_GND
N$11
  Top 0.406: U$7.8 67.24,27.87 64.77,25.4 59.37,25.4 58.74,24.77 | EC.VCC 57.43,16.23 C18.1 59.05,19.41 59.05,24.45 58.74,24.77 | 58.74,24.77 58.42,25.08 U2.5 | U$7.8 65.7,33.63 65.41,33.34 65.41,31.48 R11.2 63.13,29.21 60.06,29.21 R10.2 | 67.27,33.66 U$7.8 | C20.1 68.9,38.8 68.9,33.97 68.56,33.63 U$7.8
N$12
  Top 0.406: R11.1 62.61,32.15 EC.RX 63.49,34.91 64.77,36.2 67.22,36.2 U$7.6
N$13
  Top 0.406: IC1.27 41.18,67.55 C10.1 40.88,67.02 L1.2
N$14  (via drill 0.3)
  Top 0.406: R10.1 60.6,32.68 EC.TX | U$7.7 67.22,34.92 v65.41,34.92
  Bottom 0.406: v65.41,34.92 62.84,34.92 EC.TX
N$15
  Top 0.406: U2.3 54.29,23.18 53.02,24.45 53.02,26.04 54.93,27.94 R12.1
N$16
  Top 0.406: U2.1 56.2,25.08 57.42,26.3 R12.2 59.68,27.94 U$6.ISO_VCC 62.51,26.67 C19.2
N$17
  Top 1.016: F1.2 86.16,16.83 OKI.IN 89.68,19.61 C1.1
N$18
  Bottom 0.406: EC1.PRB 40.63,15.21 U$8.S
N$19
  Top 0.406: C21.1 57.82,20.69 U2.4
N$20
  Top 0.406: C22.2 35.3,17.78 C25.2 36.2,21.2 36.2,23.81 35.87,24.13 U3.2 34.29,24.13 33.66,24.77 33.66,25.4 34.29,26.04 35.24,26.04 36.2,26.99 36.2,31.1 EC1.GND 42.56,37.46 U$10.5 46.91,38.93 C24.2 47.35,39.97 48.02,40.64 49.77,40.64 50.32,40.08 50.32,33.01 C23.1 50.8,27.5 U$9.ISO_GND
N$21
  Top 0.406: 38.73,24.77 38.73,19.41 C22.1 37.09,16.24 EC1.VCC | 38.73,24.77 38.42,25.08 U3.5 | U$10.8 46.91,27.86 44.45,25.4 39.37,25.4 38.73,24.77 | R14.2 38.47,30.11 39.37,29.21 42.8,29.21 R15.2 45.09,31.5 45.09,33.34 45.4,33.65 U$10.8 | C24.1 49.15,34.54 48.26,33.66 U$10.8
N$22
  Bottom 0.406: EC1.PRA 43.17,15.21 U$8.GND
N$23
  Top 0.406: R15.1 42.27,32.1 EC1.RX 43.18,35.01 44.37,36.2 U$10.6
N$24  (via drill 0.3)
  Top 0.406: R14.1 40.27,32.63 EC1.TX | U$10.7 v44.77,34.92
  Bottom 0.406: v44.77,34.92 42.56,34.92 EC1.TX
N$25
  Top 0.406: U3.1 35.56,25.08 37.11,26.63 R16.2 39.39,27.94 U$9.ISO_VCC 42.2,26.69 C23.2
N$26
  Top 0.406: C25.1 37.49,20.7 U3.4
N$27
  Top 0.406: U3.3 33.97,23.18 32.7,24.45 32.7,25.65 34.99,27.94 R16.1
N$28
  Bottom 0.406: EC2.PRB U$11.S
N$29
  Top 0.406: C26.2 C29.2 15.88,21.22 15.88,23.81 15.56,24.13 U4.2 13.97,24.13 13.34,24.77 13.34,25.4 13.97,26.04 14.92,26.04 15.88,26.99 15.88,31.11 EC2.GND 17.79,33.35 18.73,34.29 20.64,34.29 23.81,37.47 26.58,37.47 U$13.5 26.59,38.93 C28.2 27.04,40.05 27.62,40.64 29.53,40.64 29.84,40.32 29.84,32.82 C27.1 30.49,27.48 U$12.ISO_GND
N$30
  Top 0.406: U$13.8 26.59,27.86 24.13,25.4 18.73,25.4 18.1,24.77 | EC2.VCC 16.78,16.25 C26.1 18.41,19.4 18.41,24.45 18.1,24.77 | 18.1,24.77 17.78,25.08 U4.5 | U$13.8 25.38,33.64 24.77,33.02 24.77,31.48 R18.2 22.5,29.21 19.05,29.21 18.14,30.12 R17.2 | C28.1 28.84,34.23 28.26,33.66 26.61,33.66 U$13.8
N$31
  Bottom 0.406: EC2.PRA U$11.GND
N$32
  Top 0.406: R18.1 21.97,32.12 EC2.RX 22.87,35.25 23.81,36.2 26.58,36.2 U$13.6
N$33  (via drill 0.3)
  Top 0.406: R17.1 19.94,32.63 EC2.TX | U$13.7 24.46,34.91 v24.45,34.92
  Bottom 0.406: v24.45,34.92 22.23,34.92 EC2.TX
N$34
  Top 0.406: C27.2 21.88,26.66 U$12.ISO_VCC 19.05,27.94 R19.2 16.78,26.31 15.56,25.08 15.24,25.08 U4.1
N$35
  Top 0.406: C29.1 17.18,20.73 U4.4
N$36
  Top 0.406: U4.3 13.65,23.18 12.38,24.45 12.38,26.04 14.29,27.94 R19.1
N$54
  Top 0.406: BAT4.VCC@1 51.37,55.88 48.26,55.88 44.45,59.69 40.64,59.69 39.64,58.69 C34.1 38.73,56.24 IC2.14
N$55
  Top 0.406: Q5.1 12.75,43.18 R34.1 17.51,45.18 R33.2
N$56
  Top 0.406: R30.2 LED7.A
N$57
  Top 0.406: Q1.1 12.75,88.9 R31.1 17.51,90.9 R29.2
N$58
  Top 0.406: R34.2 17.41,43.08 R45.1 17.86,41.09 SJ1.2
N$61
  Top 0.406: R31.2 17.41,88.8 R46.1 17.86,86.81 SJ2.2
N$62
  Top 0.406: Q2.1 12.75,73.66 R35.1 17.51,75.66 R32.2
N$63
  Top 0.406: R35.2 17.41,73.56 R47.1 17.86,71.57 SJ3.2
N$64
  Top 0.406: Q3.1 12.75,58.42 R37.1 17.51,60.42 R36.2
N$65
  Top 0.406: SJ4.2 17.86,56.33 R48.1 17.51,55.98 R37.2
N$66
  Top 0.406: R38.2 R39.1 77.64,65.67 Q4.1
N$67
  Top 0.406: R40.2 R41.1 77.64,58.05 Q6.1
N$68
  Top 0.406: R44.2 73.66,54.61 76.2,52.07 LED8.A
N$69
  Top 0.406: R45.2 LED9.A
N$70
  Top 0.406: R39.2 75.83,67.31 SJ5.1 72.84,69.03 73.66,69.85 R30.1
N$71
  Top 0.406: R41.2 73.2,60.05 SJ6.1 72.84,57.6 R44.1
N$72
  Top 0.406: R47.2 LED11.A
N$73
  Top 0.406: R42.1 18.05,97.79 OPTICAL_ENC.1
N$77
  Top 0.406: R46.2 LED10.A
N$78
  Top 0.406: R48.2 LED12.A
NUT_A
  Top 0.406: SERVO2.2 17.46,84.77 19.18,84.77 SJ2.1 43.23,85.91 IC1.13
NUT_B
  Top 0.406: IC1.14 43.24,84.77 35.24,84.77 21.14,70.67 SJ3.1 20.19,70.67 18.73,69.22 17.14,69.22 SERVO3.2
NUT_C
  Top 0.406: IC1.15 43.38,83.5 39.05,83.5 25.4,69.85 25.4,58.42 22.41,55.43 SJ4.1 20.19,55.43 18.73,53.98 17.14,53.98 SERVO4.2
OPTICAL_ENC  (via drill 0.3)
  Top 0.406: IC1.1 57.25,76.83 v64.14,76.83
  Bottom 0.406: v64.14,76.83 66.04,78.74 66.04,88.9 | 66.04,88.9 66.04,92.71 J1.4 | OPTICAL_ENC.2 15.56,99.38 66.99,99.38 71.12,95.25 71.12,92.71 67.31,88.9 66.04,88.9
PH_DOWN
  Top 0.406: IC1.16 43.52,82.23 39.69,82.23 27.94,70.48 27.94,57.15 24.13,53.34 24.13,41.91 22.41,40.19 SJ1.1 18.86,38.73 17.14,38.73 SERVO1.2
PROBE_SCL  (via drill 0.3)
  Top 0.406: IC1.19 43.62,78.74 v41.91,78.74 | v36.83,62.87 36.83,58.42 36.24,57.83 R27.1 36.24,54.18 IC2.16 36.2,54.29 33.97,52.07 v33.97,38.1 33.97,36.83 33.32,36.18 U$13.3 31.84,36.2 | v74.3,37.15 74.3,36.83 73.64,36.17 U$7.3 | U$10.3 53.66,36.2 53.98,36.51 v53.98,37.15
  Bottom 0.406: v41.91,78.74 40.64,77.47 40.64,74.93 36.83,71.12 v36.83,62.87 | v33.97,38.1 34.29,37.78 53.34,37.78 | 53.34,37.78 73.66,37.78 v74.3,37.15 | v53.98,37.15 53.34,37.78
PROBE_SDA  (via drill 0.3)
  Top 0.406: IC1.20 44.77,76.46 v44.77,75.25 | v38.1,61.91 37.83,61.64 R28.1 37.83,57.52 37.47,57.15 IC2.15 37.47,52.7 34.92,50.16 v34.92,36.83 34.92,36.2 33.66,34.92 31.84,34.92 U$13.2 | v74.93,35.56 74.93,35.24 74.59,34.9 U$7.2 | U$10.2 54.61,34.92 54.93,35.24 v54.93,35.56
  Bottom 0.406: v44.77,75.25 38.1,68.58 v38.1,61.91 | v34.92,36.83 35.56,36.2 54.29,36.2 | 54.29,36.2 74.3,36.2 v74.93,35.56 | v54.93,35.56 54.29,36.2
RAIN_GUAGE  (via drill 0.3)
  Top 0.406: IC1.42 56.26,71.75 60.01,71.75 62.55,74.3 v64.45,74.3 | C32.1 79.38,81.02 RAIN.3
  Bottom 0.406: v64.45,74.3 67.63,77.47 74.3,77.47 RAIN.3
RST
  Top 0.406: IC1.4 56.71,79.69 60.01,79.69 61.12,80.81 R1.2 61.12,84.93 60.33,85.72 60.33,94.61 J1.5 59.69,99.06 41.91,99.06 38.1,95.25 CP210X.6
RX
  Top 0.406: IC1.9 52.7,81.34 52.7,84.14 46.67,90.17 32.7,90.17 30.48,92.39 CP210X.3
SOLENOID  (via drill 0.3)
  Top 0.406: IC1.3 56.89,78.74 60.96,78.74 63.5,81.28 v63.5,82.55 | SJ5.2 71.94,72.84 v65.09,79.69
  Bottom 0.406: J1.3 63.18,98.11 61.59,98.11 60.64,97.16 60.64,93.03 63.5,90.17 v63.5,82.55 65.09,80.96 v65.09,79.69
SOLENOID1
  Top 0.406: IC1.2 57.07,77.79 61.28,77.79 62.87,79.38 | 62.87,79.38 68.9,85.41 68.9,94.93 J1.1 | SJ6.2 71.94,60.14 68.58,63.5 68.58,73.66 62.87,79.38
TEMP  (via drill 0.3)
  Top 0.406: IC1.41 56.08,70.8 61.28,70.8 63.18,72.71 v63.5,72.71 | R2.2 95.24,71.5 DS18B20_1.2 DS18B20_2.2 DS18B20_3.2 DS18B20_4.2 DS18B20_5.2 DS18B20_6.2 DS18B20_7.2 DS18B20_8.2
  Bottom 0.406: v63.5,72.71 87,72.71 88.27,71.44 93.66,71.44 95.24,73.02 DS18B20_1.2
TX
  Top 0.406: IC1.10 52.07,81.84 52.07,83.19 46.67,88.58 29.84,88.58 27.94,90.49 CP210X.2

## Text on the board
tPlace: DHT22 | 4 | RAIN / GUAGE | ENC | 2 | 5 | PROGRAMMER / CP210x | MOTOR | 12 | Salad Bar | DS18B20 | 18 | Skip Xtian | 1 | FLOAT | v1 24/9/16 | AIR SERVO | A0 | SOLENOID | MOTOR | 13 | 7 | 19 | FLOAT | MOTOR | 14 | 6 | 20 | SOLENOID | FLOAT | 10 | FLOW | MOTOR | FLOW | 11 | 15 | 21 | HALL EFFECT | 0 | FLOAT | 4k7 | 3 | GND | FLOAT | E | T | PING | A1-A7 | 23 | 22 | 12v
bPlace: Tx | Rx